# EAGLE board mic-preamp-stereo6. (EAGLE 6.2)
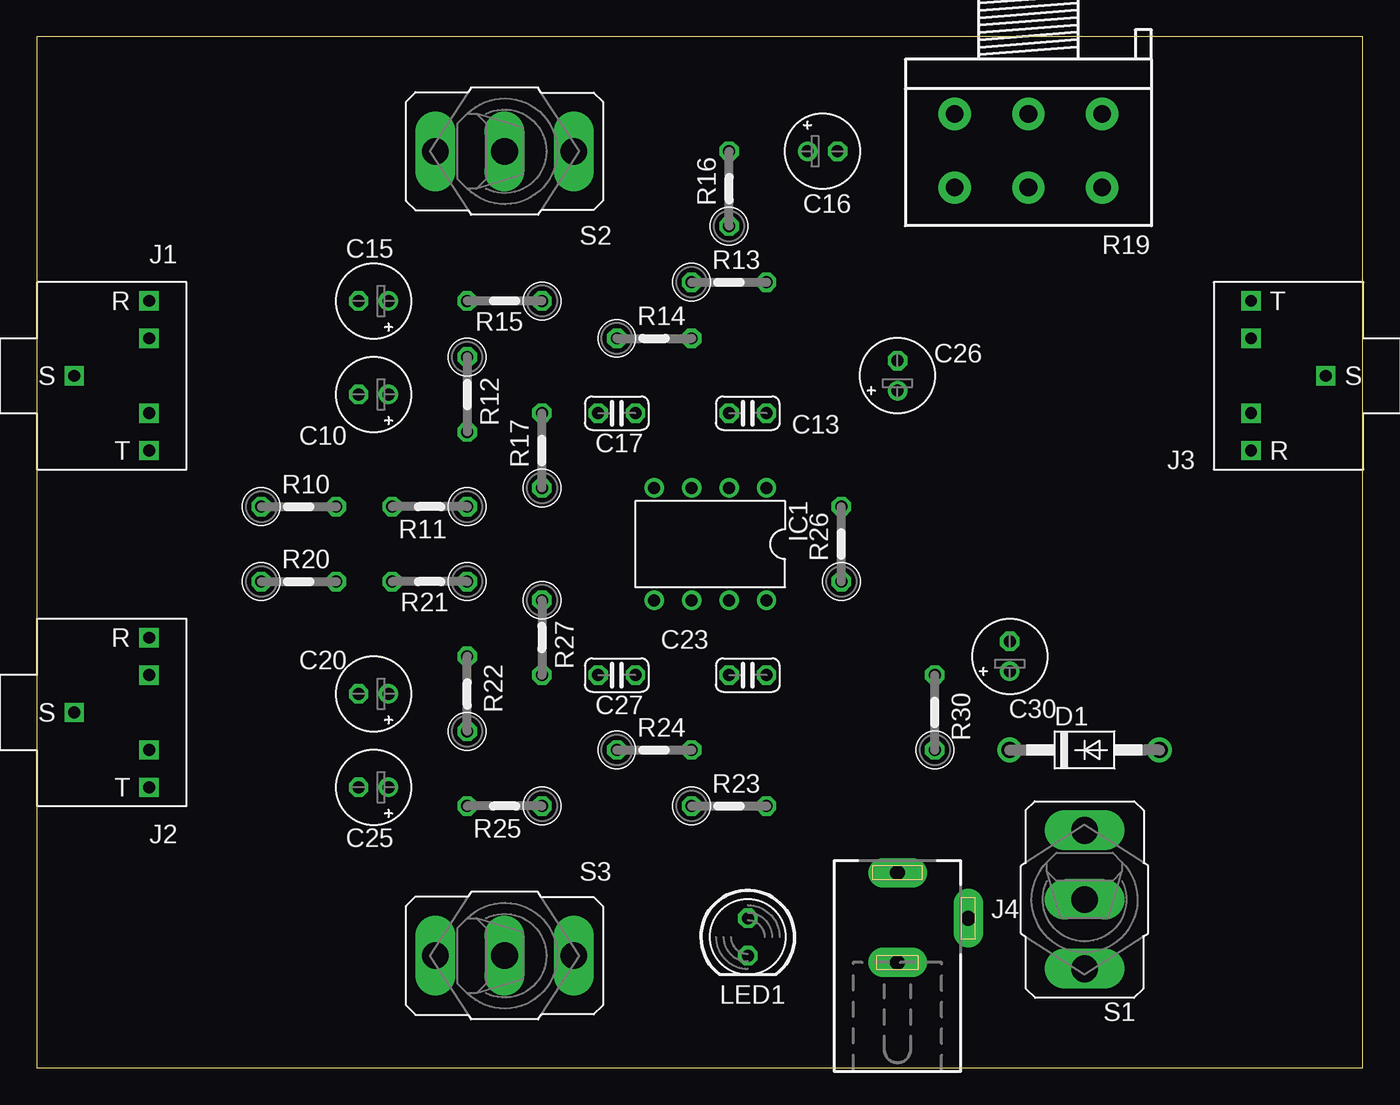
[diagram p0: board, top side]
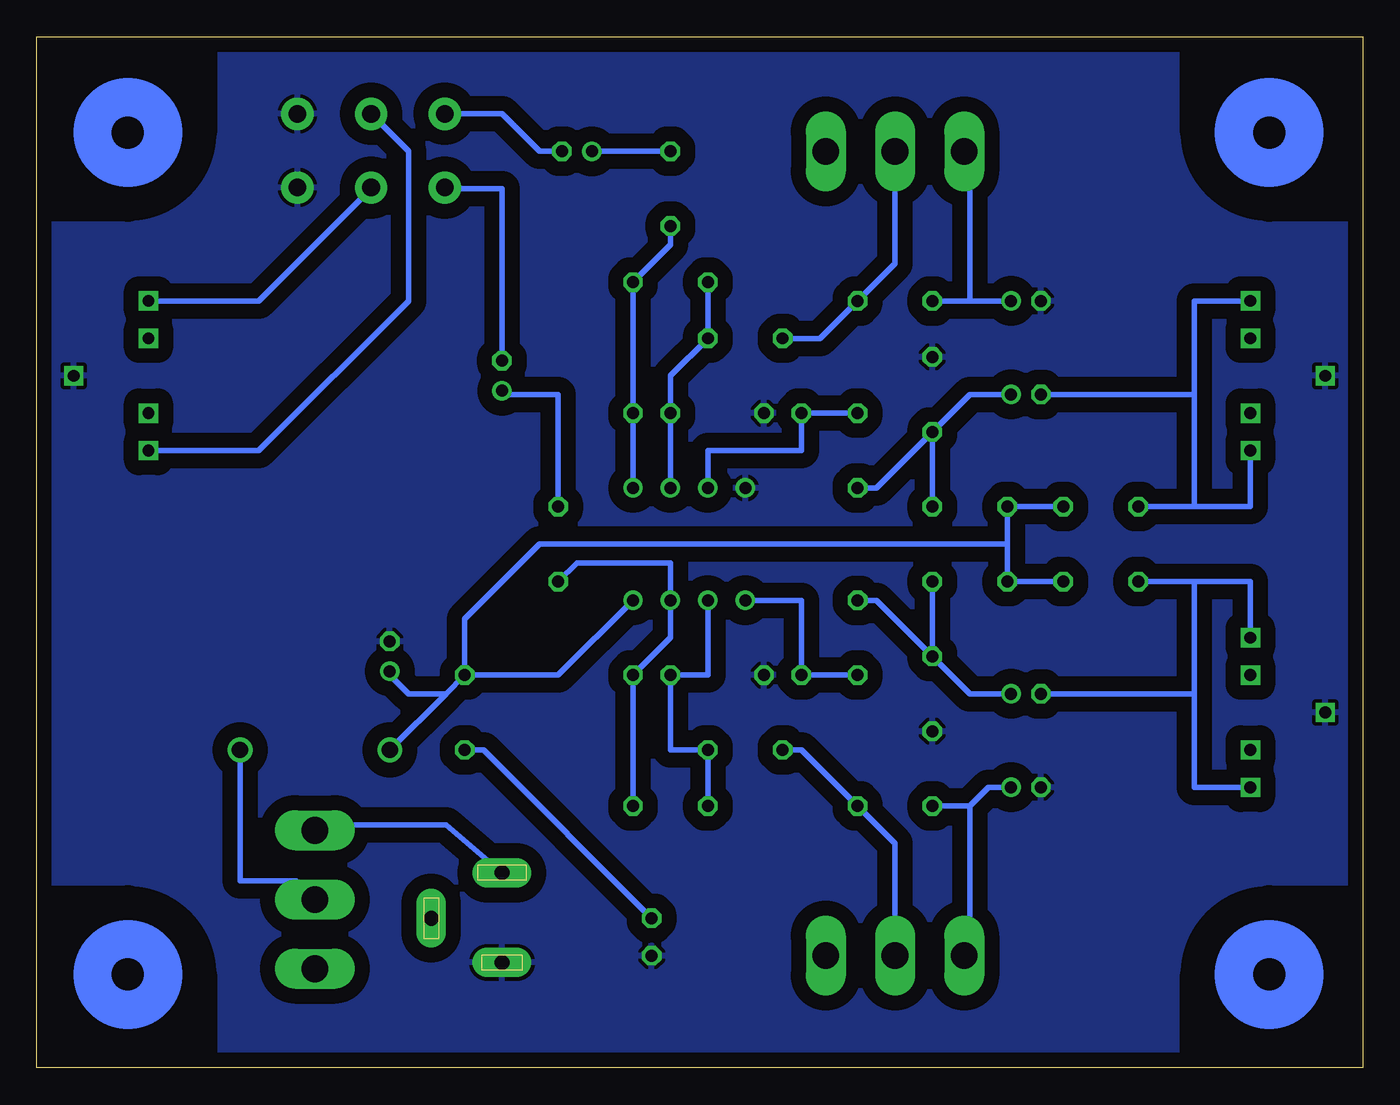
[diagram p1: board, bottom side, seen from below]

Size 90 x 70 mm. Coordinates in mm from the lower left corner, seen from the top.
Outline: 0,0 90,0 90,70 0,70 0,0
Copper layers 16: Bottom 0.035mm
Design rules: minimum track width 12mil, minimum drill 0.3mm, track to track 10mil, track to pad 10mil, pad to pad 10mil, via to via 10mil, smd to smd 10mil, copper to edge 40mil, drill to drill 8mil, minimum pad ring 10mil, minimum via ring 8mil, stop-mask expansion 8mil, vias tented up to drill 0mil, thermal gap 10mil
Net classes: 0 default: width 0.381 mm; 1 Ground: width 0.305 mm, clearance 0.229 mm
bRestrict: area 79,-2.5 to 92.7,11.2; area 82,61.7 to 85.6,65.3; area 4.6,61.7 to 8.1,65.3; area 4.6,4.6 to 8.1,8.1; area 79,58.7 to 92.7,72.4; area -2.5,58.7 to 11.2,72.4; area -2.5,-2.5 to 11.2,11.2; area 82,4.6 to 85.6,8.1

## Footprints (pad centres in the part's own frame; a part is rotated, then mirrored left to right if it is on the bottom)
E2-5 = drill 0.813 pad 1.27: + -1.016,0 | drill 0.813 pad 1.27 octagon: - 1.016,0
C025-024X044 = drill 0.813 octagon: 1 -1.27,0; 2 1.27,0
DO41-10 = drill 1.118: A 5.08,0; C -5.08,0
DIL08 = drill 0.813 pad 1.27: 1 -3.81,-3.81; 2 -1.27,-3.81; 3 1.27,-3.81; 4 3.81,-3.81; 5 3.81,3.81; 6 1.27,3.81; 7 -1.27,3.81; 8 -3.81,3.81
PICAXE_STEREOJACKSOCKET = drill 0.8 square: RING -5.08,-5.08; RING_SW -5.08,-2.54; SLEEVE 0,0; TIP -5.08,5.08; TIP_SW -5.08,2.54
DCJ0202 = drill 1 pad 2 long: 1 0,3.1; 2 4.8,0; 3 0,-3
LED5MM = drill 0.813 octagon: A -1.27,0; K 1.27,0
0207/5V = drill 0.813 octagon: 1 -2.54,0; 2 2.54,0
3RP/1610G = drill 1.2 pad 2.184: 1-1 -5,0; 1-2 0,0; 1-3 5,0; 2-1 -5,5; 2-2 0,5; 2-3 5,5
M9040P = drill 1.803 long: 1 0,4.699; 2 0,0; 3 0,-4.699

## Placement (x,y rotation side)
C10  2.2u  [E2-5]  22.86,45.72 180 top
C13  2.2p  [C025-024X044]  48.26,44.45 180 top
C15  10u  [E2-5]  22.86,52.07 180 top
C16  2.2u  [E2-5]  53.34,62.23 0 top
C17  4.7nF  [C025-024X044]  39.37,44.45 180 top
C20  2.2u  [E2-5]  22.86,25.4 180 top
C23  2.2p  [C025-024X044]  48.26,26.67 180 top
C25  10u  [E2-5]  22.86,19.05 180 top
C26  2.2u  [E2-5]  58.42,46.99 90 top
C27  4.7nF  [C025-024X044]  39.37,26.67 180 top
C30  47u  [E2-5]  66.04,27.94 90 top
D1  1N4004  [DO41-10]  71.12,21.59 0 top
IC1  TL072P  [DIL08]  45.72,35.56 180 top
J1  PICAXE_STEREOJACKSOCKET  [PICAXE_STEREOJACKSOCKET]  2.54,46.99 180 top
J2  PICAXE_STEREOJACKSOCKET  [PICAXE_STEREOJACKSOCKET]  2.54,24.13 180 top
J3  Stereo Out  [PICAXE_STEREOJACKSOCKET]  87.5,46.99 0 top
J4  DC 7-15VDC  [DCJ0202]  58.42,10.16 0 top
LED1  [LED5MM]  48.26,8.89 270 top
R10  10k  [0207/5V]  17.78,38.1 0 top
R11  27k  [0207/5V]  26.67,38.1 180 top
R12  27k  [0207/5V]  29.21,45.72 270 top
R13  33k  [0207/5V]  46.99,53.34 0 top
R14  1.5k  [0207/5V]  41.91,49.53 0 top
R15  27k  [0207/5V]  31.75,52.07 180 top
R16  100  [0207/5V]  46.99,59.69 90 top
R17  100  [0207/5V]  34.29,41.91 90 top
R19  [3RP/1610G]  67.31,64.77 180 top
R20  10k  [0207/5V]  17.78,33.02 0 top
R21  27k  [0207/5V]  26.67,33.02 180 top
R22  27k  [0207/5V]  29.21,25.4 90 top
R23  33k  [0207/5V]  46.99,17.78 0 top
R24  1.5k  [0207/5V]  41.91,21.59 0 top
R25  27k  [0207/5V]  31.75,17.78 180 top
R26  100  [0207/5V]  54.61,35.56 90 top
R27  100  [0207/5V]  34.29,29.21 270 top
R30  680  [0207/5V]  60.96,24.13 90 top
S1  Power  [M9040P]  71.12,11.43 180 top
S2  [M9040P]  31.75,62.23 270 top
S3  [M9040P]  31.75,7.62 270 top

## Library data of the parts
C10 C13 C15-C17 C20 C23 C25-C27 C30 R10-R16 R20-R26 R30 = rcl
D1 = diode
IC1 = linear
J1-J3 = PICAXE_StereoJackSocket
J4 = con-jack; OC_FARNELL: unknown; OC_NEWARK: unknown
LED1 = led
R17 R27 = resistor
R19 = pot
S1-S3 = switch

## Nets
+9V: J4.1 S1.3
GND [Ground]: C15.- C17.1 C25.- C27.1 C30.- IC1.4 J1.SLEEVE J2.SLEEVE J3.SLEEVE J4.3 LED1.K R12.1 R19.1-1 R19.2-1 R22.1
N$1: C10.+ R11.1 R12.2 R17.1
N$2: C13.1 IC1.1 R13.2 R16.1
N$3: C13.2 IC1.2 R13.1 R14.2
N$4: C30.+ D1.C IC1.8 R10.2 R11.2 R20.2 R21.2 R30.2
N$5: R14.1 R15.1 S2.2
N$6: C16.+ R16.2
N$7: C10.- J1.RING J1.TIP R10.1
N$8: D1.A S1.2
N$9: C15.+ R15.2 S2.3
N$10: C16.- R19.1-3
N$11: LED1.A R30.1
N$12: C20.+ R21.1 R22.2 R27.1
N$13: C26.- R19.2-3
N$16: C23.1 IC1.7 R23.2 R26.1
N$17: C23.2 IC1.6 R23.1 R24.2
N$18: J3.TIP R19.2-2
N$19: R24.1 R25.1 S3.2
N$20: C26.+ R26.2
N$21: C20.- J2.RING J2.TIP R20.1
N$22: C25.+ R25.2 S3.3
N$23: J3.RING R19.1-2
N$24: C17.2 IC1.3 R17.2
N$27: C27.2 IC1.5 R27.2

## Tracks (layer width: path | path; a pad name or v marks a point on that pad's centre or on a via)
+9V
  Bottom 0.381: J4.1 62.23,16.51 71.12,16.51 S1.3
GND
  pour Bottom (isolate 1.016): 0,69.85 90.17,69.85 90.17,0 0,0
N$1
  Bottom 0.381: R12.2 26.67,45.72 C10.+ | R12.2 R11.1 | R12.2 33.02,39.37 R17.1
N$2
  Bottom 0.381: IC1.1 C13.1 R13.2 46.99,55.88 R16.1
N$3
  Bottom 0.381: IC1.2 C13.2 46.99,46.99 R14.2 R13.1
N$4
  Bottom 0.381: R20.2 R21.2 24.13,35.56 | R10.2 R11.2 24.13,35.56 | IC1.8 54.61,26.67 R30.2 | 62.23,25.4 64.77,25.4 66.04,26.67 C30.+ | R30.2 62.23,25.4 | 62.23,25.4 D1.C | 24.13,35.56 55.88,35.56 60.96,30.48 R30.2
N$5
  Bottom 0.381: R14.1 36.83,49.53 R15.1 31.75,54.61 S2.2
N$6
  Bottom 0.381: C16.+ R16.2
N$7
  Bottom 0.381: J1.TIP 7.62,38.1 11.43,38.1 | R10.1 11.43,38.1 | J1.RING 11.43,52.07 11.43,45.72 | 11.43,38.1 11.43,45.72 | 11.43,45.72 C10.-
N$8
  Bottom 0.381: D1.A 76.2,12.7 72.39,12.7 S1.2
N$9
  Bottom 0.381: R15.2 26.67,52.07 | 26.67,52.07 C15.+ | 26.67,52.07 26.67,62.23 S2.3
N$10
  Bottom 0.381: R19.1-3 58.42,64.77 55.88,62.23 C16.-
N$11
  Bottom 0.381: LED1.A 59.69,21.59 R30.1
N$12
  Bottom 0.381: R22.2 26.67,25.4 C20.+ | R22.2 R21.1 | R22.2 33.02,31.75 R27.1
N$13
  Bottom 0.381: C26.- 58.42,59.69 62.23,59.69 R19.2-3
N$16
  Bottom 0.381: R23.2 C23.1 46.99,29.21 IC1.7 46.99,34.29 53.34,34.29 R26.1
N$17
  Bottom 0.381: R23.1 R24.2 46.99,21.59 C23.2 44.45,26.67 IC1.6
N$18
  Bottom 0.381: 82.55,52.07 J3.TIP 74.93,52.07 67.31,59.69 R19.2-2
N$19
  Bottom 0.381: R24.1 38.1,21.59 R25.1 31.75,15.24 S3.2
N$20
  Bottom 0.381: R26.2 54.61,45.72 58.42,45.72 C26.+
N$21
  Bottom 0.381: 11.43,25.4 11.43,19.05 J2.TIP | C20.- 11.43,25.4 | 11.43,25.4 11.43,33.02 | 11.43,33.02 7.62,33.02 J2.RING | 11.43,33.02 R20.1
N$22
  Bottom 0.381: 26.67,17.78 26.67,7.62 S3.3 | 26.67,17.78 R25.2 | 26.67,17.78 25.4,19.05 C25.+
N$23
  Bottom 0.381: R19.1-2 64.77,62.23 64.77,52.07 74.93,41.91 J3.RING 82.55,41.91
N$24
  Bottom 0.381: R17.2 C17.2 38.1,41.91 44.45,41.91 IC1.3
N$27
  Bottom 0.381: R27.2 C27.2 38.1,31.75 IC1.5
(copper drawn outside any net)
  shapes: Bottom circle x12

## Text on the board
tValues: Ⓛ | Gain | Ⓛ in | Ⓡ in | Stereo Out | (+) core | - | Ⓡ | + | Gain